# Altium PCB PCB.PcbDoc (part 3 of 11)
Units mm, origin at the board's own origin, x right, y up, seen from the top; angles counter-clockwise.
Board outline 100.46 x 70.51 mm, 10 copper layers (L1(SIG), L2(GND), L3(PWR), L4(SIG), L5(GND), L6(SIG), L7(GND), L8(SIG), L9(GND), L10(SIG)), stack 1.49 mm thick; 425 components, 324 nets, 2004 pads, 1425 vias.
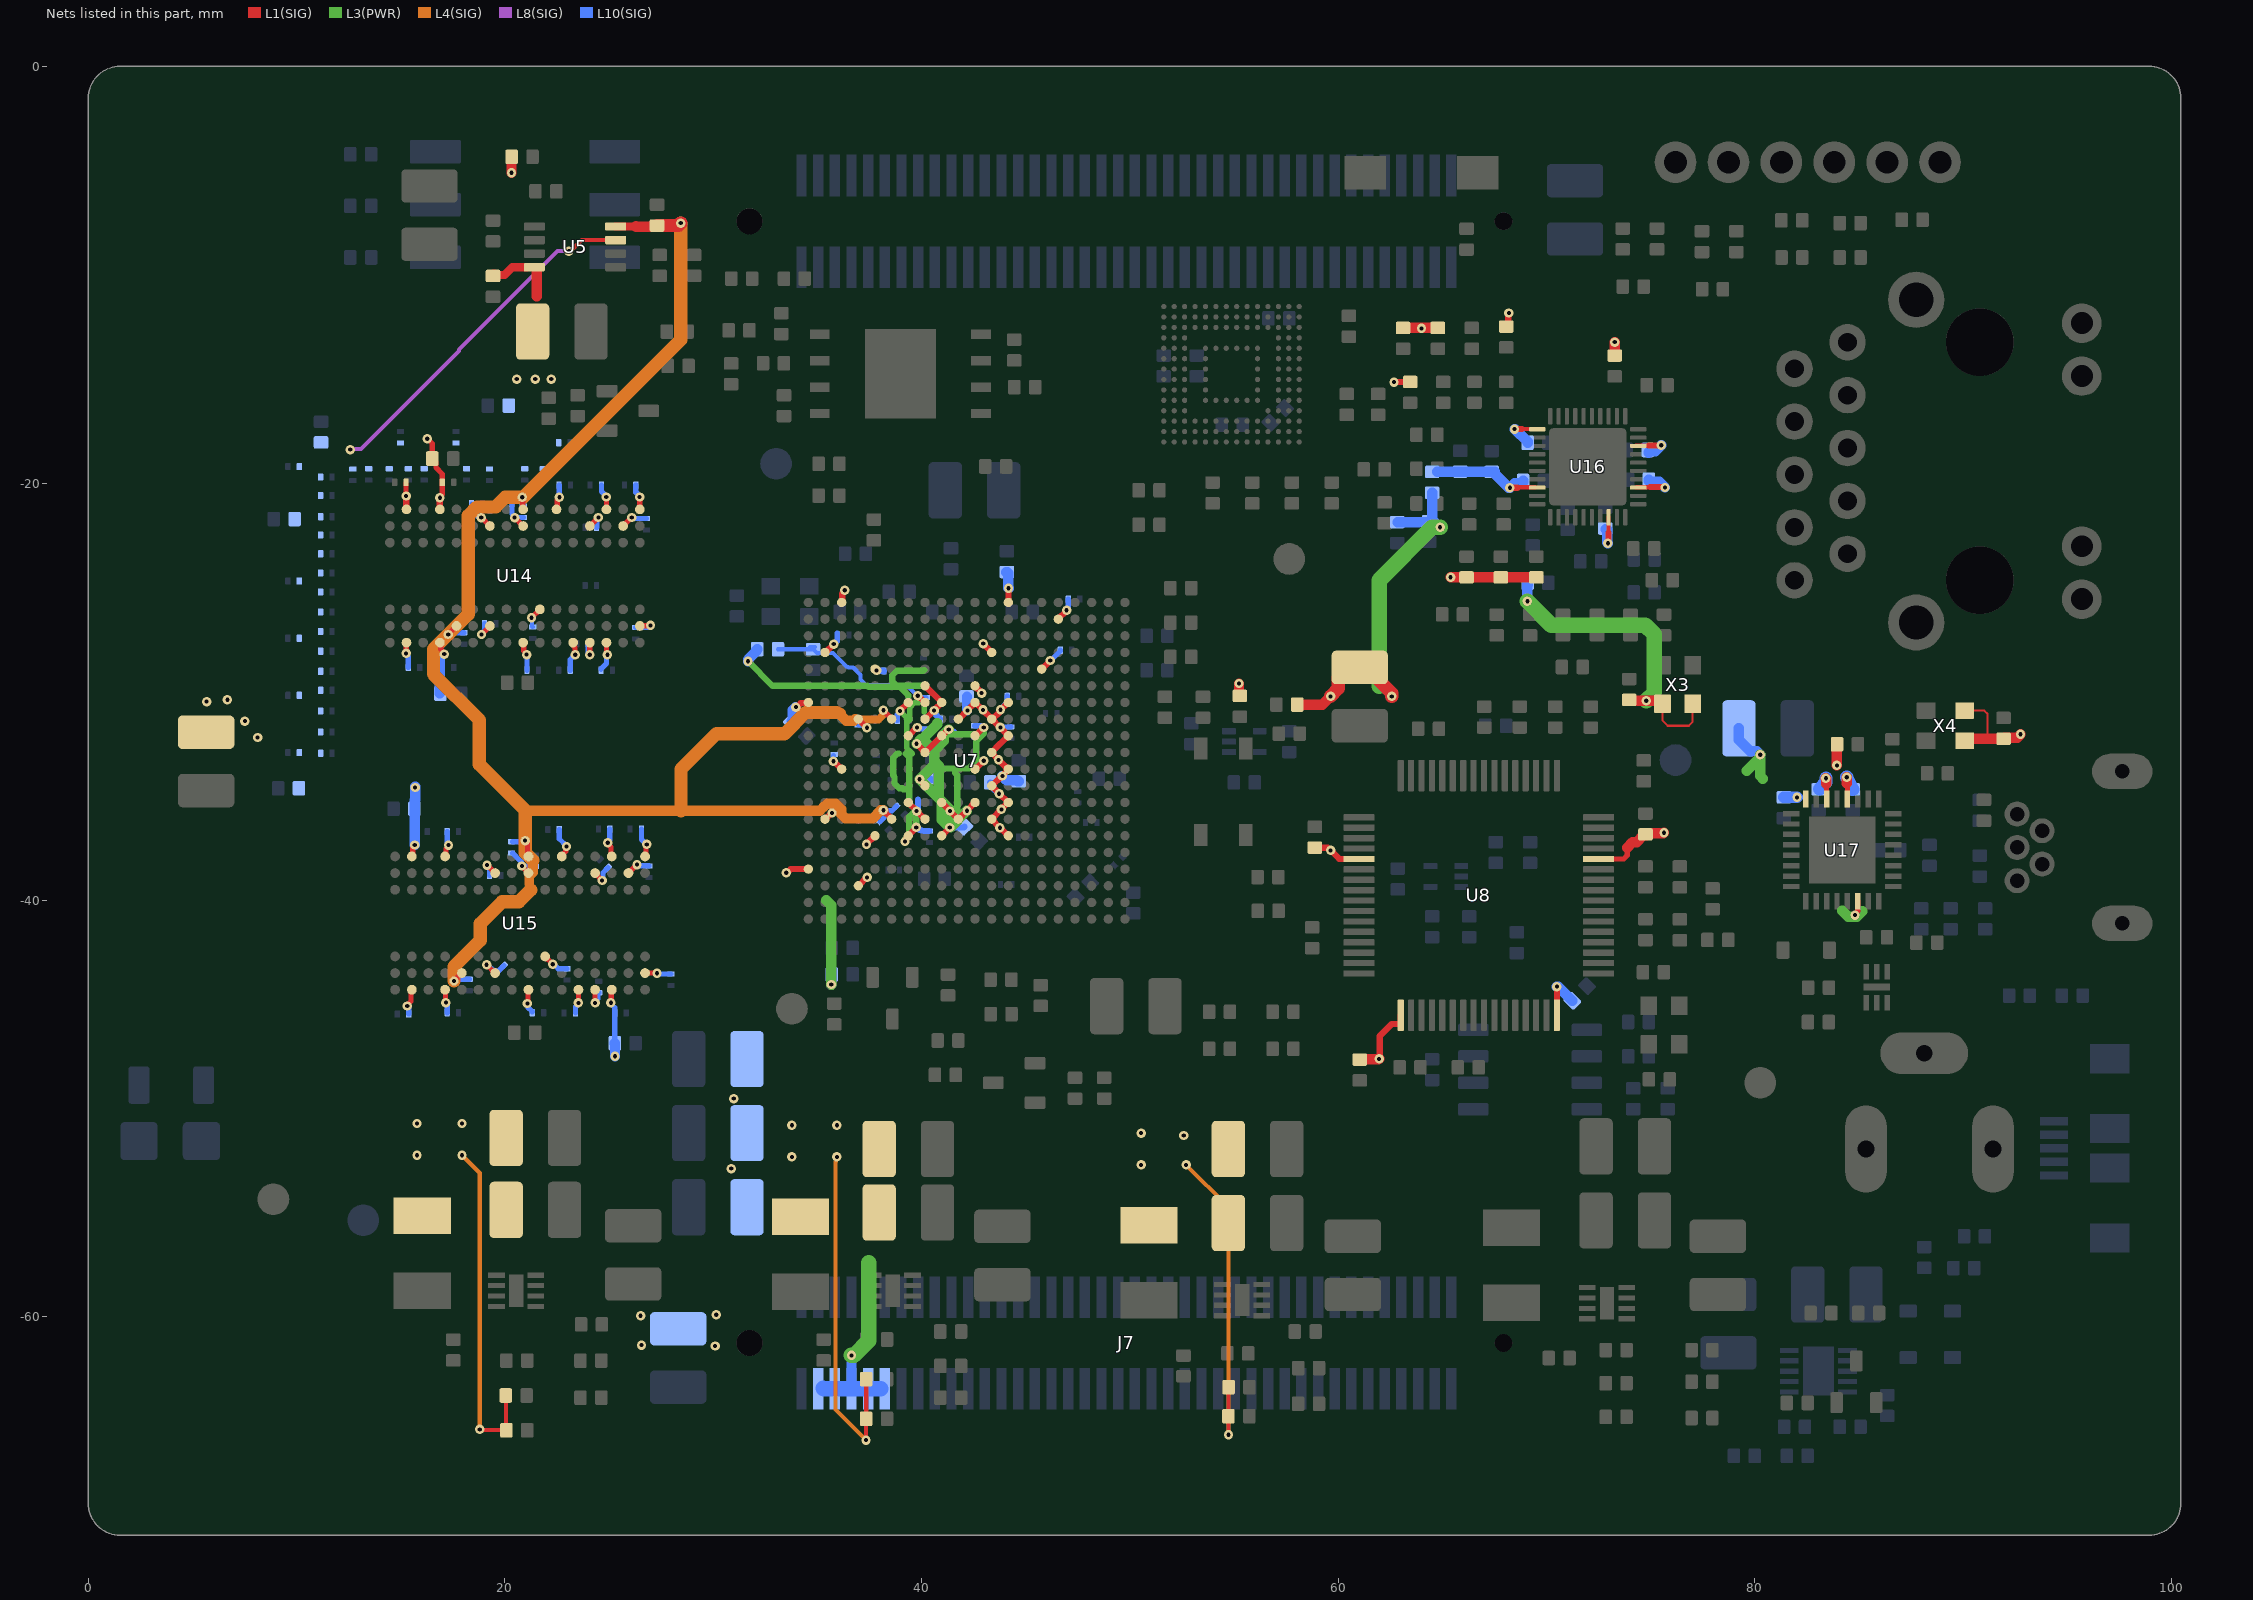
[diagram p10: the nets of this part, all layers, seen from the top]

## Via types
v1: diameter 0.45, hole 0.2, L1(SIG) to L10(SIG), tented both sides, 1194 vias
v2: diameter 0.45, hole 0.2, L1(SIG) to L10(SIG), 211 vias
v3: diameter 0.6, hole 0.25, L1(SIG) to L10(SIG), 9 vias
v4: diameter 0, hole 0.2, L1(SIG) to L10(SIG), tented both sides, 6 vias
v5: diameter 5, hole 3.2, L1(SIG) to L10(SIG), tented both sides, 4 vias
v6: diameter 0.45/0.45/0.45/0.45/0.45/0.45/0.45/0.45/0.45/0.45 (per signal layer), hole 0.2, L1(SIG) to L10(SIG), tented both sides, 1 vias

## Nets (pads, with @x,y where several pads share a name; then routed paths per layer and width w, separated by ;. In a path a pad name is that pad's centre, name@x,y a point inside that pad or via, vN(x,y) a via of type N, cw(c..) or ccw(c..) an arc to the next point about the centre after c; other vN are vias at no path point) (continued)
+1V35: (continued)
  L10(SIG) w0.508: C58.2@33.783,-31.413 33.818,-31.378 33.818,-30.884 v1(33.97,-30.732)
  other v1: 15.782,-52.246 15.782,-50.722 17.941,-50.722 15.69,-34.59 8.129,-32.192 7.518,-31.407 5.684,-30.47 6.68,-30.38